# Altium PCB isa_fdc.PcbDoc (part 2 of 2)
Units mm, origin at the board's own origin, x right, y up, seen from the top; angles counter-clockwise.
Board outline 104.14 x 83.82 mm, 2 copper layers (F.Cu, B.Cu); 36 components, 102 nets, 408 pads, 101 vias.
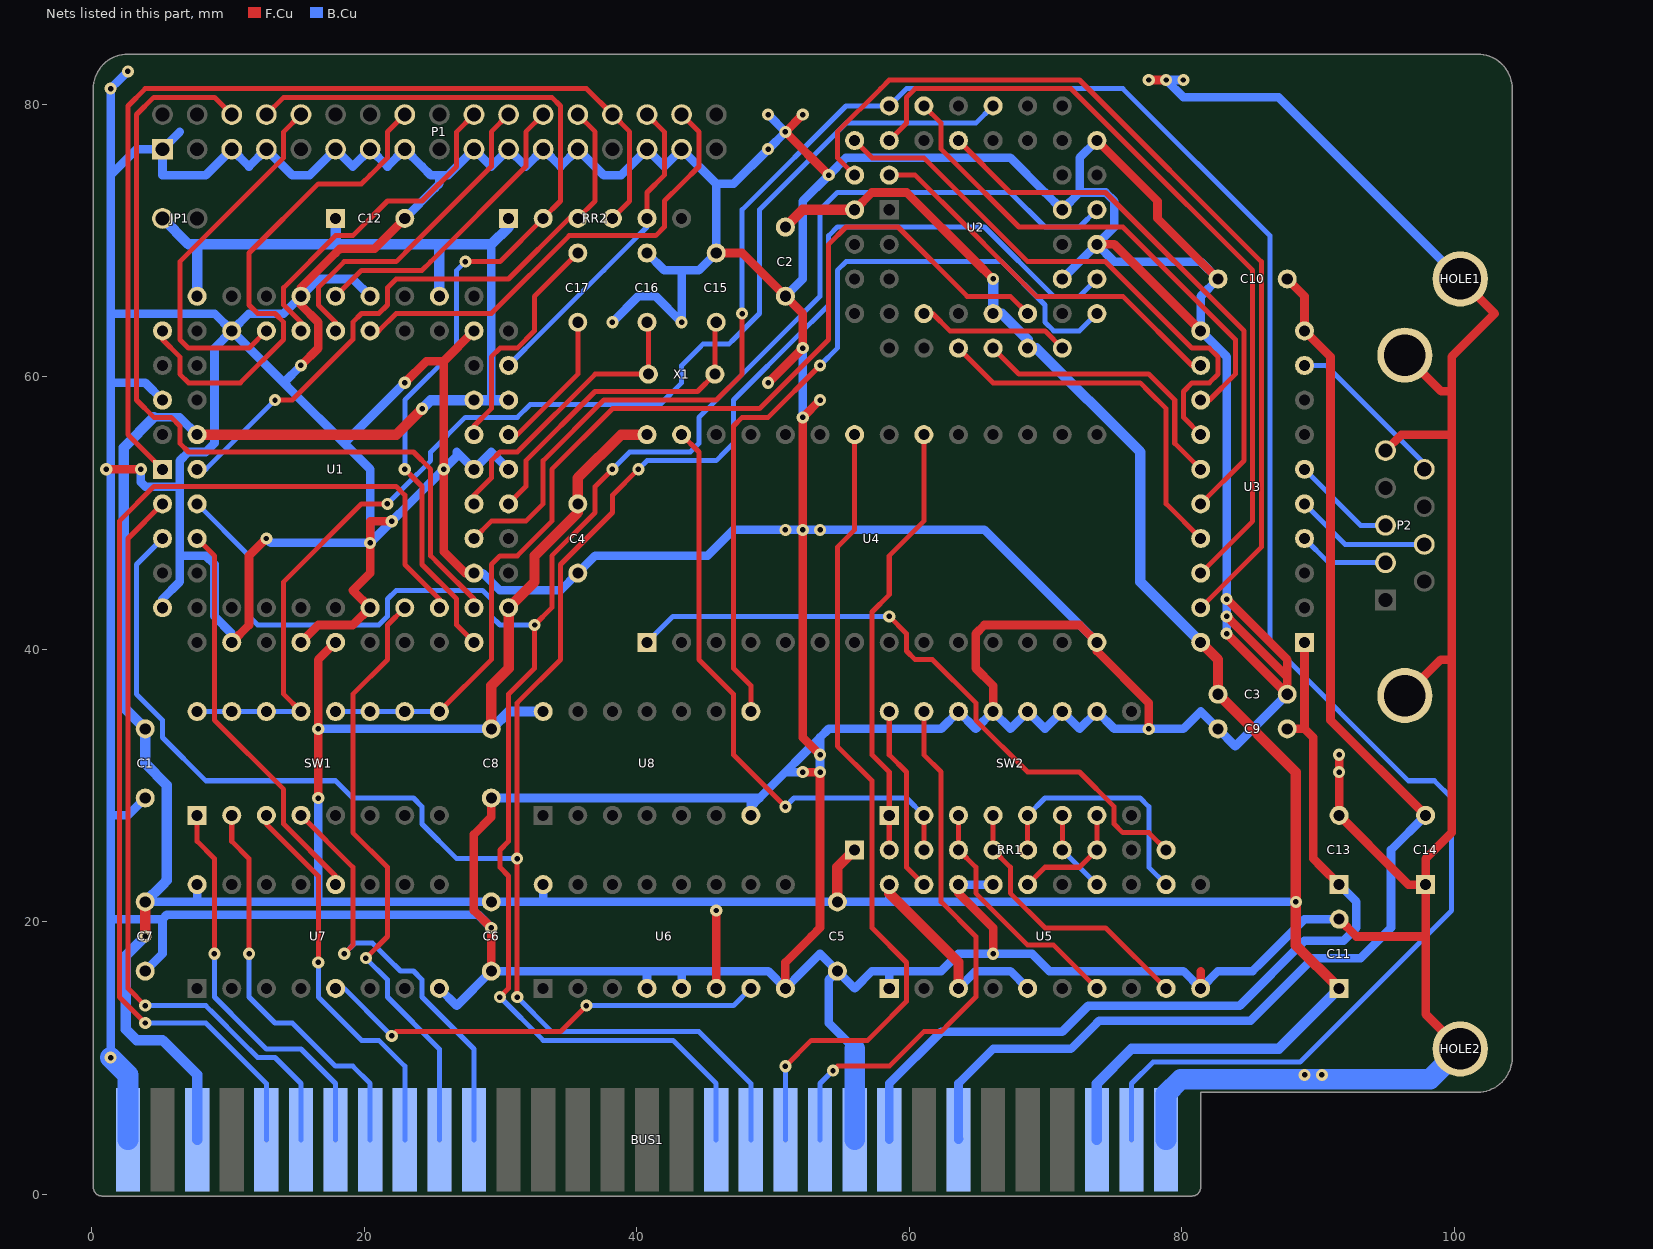
[diagram p2: the nets of this part, all layers, seen from the top]

## Via types
v1: diameter 0.889, hole 0.4, F.Cu to B.Cu, tented both sides, 101 vias

## Nets (pads, with @x,y where several pads share a name; then routed paths per layer and width w, separated by ;. In a path a pad name is that pad's centre, name@x,y a point inside that pad or via, vN(x,y) a via of type N, cw(c..) or ccw(c..) an arc to the next point about the centre after c; other vN are vias at no path point) (continued)
GND: BUS1.1 BUS1.10 BUS1.31 C1.2 C2.2 C3.2 C4.2 C5.2 C6.2 C7.2 C8.2 C9.2 C10.1 C11.2 C12.2 C13.2 C14.1 C15.2 C16.2 HOLE1.1 HOLE2.1 P1.1 P1.5 P1.7 P1.11 P1.13 P1.15 P1.19 P1.21 P1.23 P1.25 P1.29 P1.31 P2.5 P2.Un1 P2.Un2 SW2.10 SW2.11 SW2.12 SW2.13 SW2.14 U1.9 U1.12 U1.16 U1.21 U1.30 U1.35 U1.36 U1.45 U1.50 U1.54 U1.59 U1.65 U2.21 U2.22 U2.25 U2.28 U3.11 U4.14 U5.1 U5.10 U5.17 U5.18 U6.4 U6.5 U6.8 U7.8 U8.7 | length 1023.5
  F.Cu w0.632: v1(1.079,53.213) v1(3.619,53.213) ; U1.12@10.287,40.513 11.557,41.783 11.557,46.863 v1(12.827,48.133) ; U1.16@15.367,40.513 16.637,41.783 19.177,41.783 U1.21@20.447,43.053 19.177,44.323 20.447,45.593 20.447,46.228 20.447,47.498 v1(20.447,47.816) 20.447,49.403 v1(22.034,49.403) ; v1(15.367,60.833) 16.637,62.103 16.637,64.008 15.367,65.278 U1.54@15.367,65.913 15.367,66.548 17.907,69.088 18.224,69.406 20.764,69.406 C12.2@22.987,71.628 ; v1(22.987,59.563) 24.575,61.151 25.845,61.151 ; U1.30@28.067,45.593 27.432,45.593 26.797,46.228 25.845,47.18 25.845,49.403 v1(25.845,53.213) 25.845,61.151 ; U1.45@28.067,63.373 25.845,61.151 ; C6.2@29.337,16.383 v1(29.337,19.558) 29.332,19.558 28.062,20.828 28.062,26.411 29.337,27.686 C8.2@29.337,29.083 ; C15.2@45.847,69.088 47.752,69.088 C2.2@50.927,65.913 52.197,64.643 v1(52.197,62.103) v1(49.657,59.563) ; U6.8@50.927,15.113 50.927,17.018 52.832,18.923 53.467,19.558 v1(53.467,30.988) v1(52.197,30.988) ; v1(52.197,79.248) v1(50.927,77.978) v1(54.102,74.803) ; v1(53.467,32.258) 52.197,33.528 v1(52.197,48.768) 52.197,53.848 v1(52.197,57.023) v1(53.467,58.293) ; U5.18@63.627,22.733 63.627,22.098 66.167,19.558 66.167,18.923 v1(66.167,17.653) ; SW2.13@66.167,35.433 66.167,37.338 64.897,38.608 64.897,41.148 65.532,41.783 72.517,41.783 U4.14@73.787,40.513 73.787,39.878 77.597,36.068 v1(77.597,34.163) ; U2.22@73.787,69.723 75.057,69.723 U3.11@81.407,63.373 ; U2.28@73.787,77.343 78.232,72.898 78.232,71.628 C10.1@82.677,67.183 ; v1(77.597,81.788) v1(78.867,81.788) ; U5.10@81.407,15.113 81.407,16.383 ; v1(83.312,41.148) C3.2@87.757,36.703 87.757,37.973 ; v1(83.312,42.418) 83.947,41.783 87.757,37.973 ; v1(83.312,43.688) 87.757,39.243 87.757,37.973 ; C11.2@91.567,20.193 92.837,18.923 97.917,18.923 ; v1(91.567,32.258) v1(91.567,30.988) C13.2@91.567,27.813 96.012,23.368 96.647,22.733 C14.1@97.917,22.733 ; P2.5@94.971,54.585 96.139,55.753 99.822,55.753 ; P2.Un1@96.393,36.604 99.032,39.243 99.822,39.243 ; P2.Un2@96.393,61.592 99.057,58.928 99.822,58.928 ; HOLE2.1@100.457,10.668 97.917,13.208 97.917,14.478 97.917,18.923 ; HOLE1.1@100.457,67.183 102.997,64.643 99.822,61.468 99.822,58.928 ; 97.917,18.923 97.917,20.828 C14.1@97.917,22.733 ; C14.1@97.917,22.733 97.917,24.003 97.917,24.638 99.822,26.543 99.822,39.243 ; 99.822,39.243 99.822,39.878 99.822,54.483 99.822,55.753 ; 99.822,55.753 99.822,58.928
  B.Cu w0.632: v1(1.079,53.213) v1@1.397,53.213 ; 2.667,8.763 v1(1.397,10.033) 1.397,17.653 1.397,19.558 1.397,20.193 ; v1(2.667,82.423) 2.032,81.788 v1(1.397,81.153) 1.397,74.803 ; v1(3.619,53.213) 3.619,52.261 3.937,51.943 6.477,51.943 ; C7.2@3.937,16.383 5.207,17.653 5.207,19.558 5.207,20.193 ; C1.2@3.937,29.083 2.667,27.813 1.397,27.813 ; U1.9@5.207,43.053 5.207,43.688 6.477,44.958 6.477,46.863 ; U1.65@5.207,58.293 3.937,59.563 1.397,59.563 ; 6.477,77.978 P1.1@5.207,76.708 ; U1.12@10.287,40.513 10.287,41.148 9.017,42.418 9.017,45.593 9.017,46.228 8.382,46.863 6.477,46.863 ; v1(12.827,48.133) 13.144,47.816 v1(20.447,47.816) ; v1(15.367,60.833) 14.097,59.563 ; U1.50@20.447,65.913 19.177,67.183 16.637,67.183 U1.54@15.367,65.913 14.097,64.643 11.557,64.643 U1.59@10.287,63.373 ; v1(22.987,59.563) 18.542,55.118 ; C12.2@22.987,71.628 25.209,73.85 25.527,74.168 25.527,74.803 ; U7.8@25.527,15.113 26.797,13.843 C6.2@29.337,16.383 31.877,16.383 40.767,16.383 ; U1.30@28.067,45.593 28.702,45.593 29.972,44.323 33.147,44.323 34.417,44.323 C4.2@35.687,45.593 36.957,46.863 43.942,46.863 45.212,46.863 47.117,48.768 v1(50.927,48.768) v1(52.197,48.768) v1(53.467,48.768) 65.532,48.768 U4.14@73.787,40.513 ; v1(29.337,19.558) 28.384,20.511 20.447,20.511 7.112,20.511 5.524,20.511 5.207,20.193 ; C8.2@29.337,29.083 31.877,29.083 47.117,29.083 48.387,29.083 ; U1.35@30.607,53.213 29.337,54.483 U1.36@28.067,53.213 26.797,54.483 26.797,54.165 v1(25.845,53.213) 23.304,50.673 v1(22.034,49.403) v1(20.447,47.816) ; v1(38.227,64.008) 40.132,65.913 41.402,65.913 v1(43.307,64.008) 43.307,67.818 ; U6.4@40.767,15.113 40.767,16.383 ; C16.2@40.767,69.088 42.037,67.818 43.307,67.818 ; U6.5@43.307,15.113 43.307,16.383 42.672,16.383 ; v1(49.657,79.248) v1(50.927,77.978) v1(49.657,76.708) 47.117,74.168 45.847,74.168 ; C2.2@50.927,65.913 52.197,67.183 52.197,72.898 v1(54.102,74.803) 55.372,76.073 67.437,76.073 69.977,73.533 U2.25@71.247,72.263 72.517,73.533 ; v1(52.197,30.988) 50.927,30.988 ; v1(52.197,57.023) v1(52.197,62.103) ; v1(53.467,30.988) v1(53.467,32.258) 53.467,33.528 ; 56.007,10.668 54.102,12.573 54.102,15.748 C5.2@54.737,16.383 ; U5.1@58.547,15.113 58.547,16.383 ; U5.18@63.627,22.733 U5.17@66.167,22.733 ; U2.21@71.247,67.183 U2.22@73.787,69.723 ; U2.28@73.787,77.343 72.517,76.073 72.517,73.533 ; v1(80.137,81.788) v1(78.867,81.788) 80.137,80.518 87.122,80.518 90.297,77.343 HOLE1.1@100.457,67.183 ; v1(83.312,41.148) v1(83.312,42.418) v1(83.312,43.688) 83.312,61.468 U3.11@81.407,63.373 81.407,65.913 C10.1@82.677,67.183 81.407,68.453 75.057,68.453 U2.22@73.787,69.723 ; C3.2@87.757,36.703 83.947,32.893 C9.2@82.677,34.163 81.407,35.433 80.137,34.163 79.502,34.163 v1(77.597,34.163) 75.057,34.163 SW2.10@73.787,35.433 72.517,34.163 SW2.11@71.247,35.433 69.977,34.163 SW2.12@68.707,35.433 67.437,34.163 SW2.13@66.167,35.433 64.897,34.163 SW2.14@63.627,35.433 62.357,34.163 54.102,34.163 53.467,33.528 ; v1(89.027,8.763) v1(90.297,8.763) 98.552,8.763 HOLE2.1@100.457,10.668 ; C11.2@91.567,20.193 89.027,20.193 85.852,17.018 85.217,16.383 82.677,16.383 U5.10@81.407,15.113 80.137,16.383 70.294,16.383 69.025,17.653 v1(66.167,17.653) 63.627,17.653 62.357,16.383 58.547,16.383 ; 1.397,20.193 5.207,20.193 ; 1.397,20.193 1.397,27.813 ; 1.397,27.813 1.397,29.083 v1@1.397,53.213 ; v1@1.397,53.213 1.397,58.293 1.397,59.563 ; 1.397,59.563 1.397,64.643 ; 1.397,64.643 1.397,72.898 1.397,74.803 ; 1.397,64.643 9.017,64.643 U1.59@10.287,63.373 ; 1.397,74.803 3.302,76.708 P1.1@5.207,76.708 ; P1.1@5.207,76.708 5.207,74.803 8.382,74.803 P1.5@10.287,76.708 11.557,75.438 P1.7@12.827,76.708 14.732,74.803 16.002,74.803 P1.11@17.907,76.708 19.177,75.438 P1.13@20.447,76.708 21.717,75.438 P1.15@22.987,76.708 24.257,75.438 24.892,74.803 25.527,74.803 ; 6.477,46.863 6.477,51.308 6.477,51.943 ; 6.477,51.943 6.477,53.848 7.112,54.483 8.382,54.483 9.017,55.118 9.017,62.103 U1.59@10.287,63.373 ; U1.59@10.287,63.373 14.097,59.563 ; 14.097,59.563 14.732,58.928 18.542,55.118 ; 18.542,55.118 20.447,53.213 20.447,50.673 v1(20.447,47.816) ; 25.527,74.803 26.162,74.803 P1.19@28.067,76.708 29.337,75.438 P1.21@30.607,76.708 31.877,75.438 P1.23@33.147,76.708 34.417,75.438 P1.25@35.687,76.708 37.592,74.803 38.862,74.803 P1.29@40.767,76.708 42.037,75.438 P1.31@43.307,76.708 45.847,74.168 ; 40.767,16.383 42.672,16.383 ; 42.672,16.383 49.657,16.383 U6.8@50.927,15.113 52.197,16.383 53.467,17.653 C5.2@54.737,16.383 ; 43.307,67.818 44.577,67.818 C15.2@45.847,69.088 45.847,73.533 45.847,74.168 ; 48.387,29.083 U8.7@48.387,27.813 48.387,28.448 49.022,29.083 ; 48.387,29.083 49.022,29.083 ; 49.022,29.083 50.927,30.988 ; 50.927,30.988 52.197,32.258 53.467,33.528 ; C5.2@54.737,16.383 56.007,15.113 57.277,16.383 58.547,16.383 ; 72.517,73.533 74.422,73.533 75.057,72.898 75.057,70.993 U2.22@73.787,69.723
  B.Cu w1.524: v1(1.397,10.033) 2.667,8.763 BUS1.31@2.667,4 ; BUS1.10@56.007,4 56.007,10.668 ; BUS1.1@78.867,4 78.867,7.366 79.947,8.445 98.234,8.445 HOLE2.1@100.457,10.668
HDSEL: P1.32 U1.51 | length 34.6
  F.Cu w0.368: U1.51@20.447,63.373 21.082,63.373 22.352,64.643 28.702,64.643 29.337,64.643 35.052,70.358 39.497,70.358 41.402,70.358 42.037,70.993 42.037,72.898 43.307,74.168 44.577,75.438 44.577,77.978 P1.32@43.307,79.248
INDEX: P1.8 RR2.2 U1.26 | length 70.1
  F.Cu w0.368: P1.8@12.827,79.248 14.097,80.518 33.782,80.518 34.417,79.883 34.417,72.898 RR2.2@33.147,71.628 29.972,68.453 29.337,68.453 v1(27.432,68.453) ; v1(22.987,53.213) 23.622,52.578 24.257,51.943 24.257,50.673 24.257,46.228 26.797,43.688 26.797,41.783 U1.26@28.067,40.513
  B.Cu w0.368: v1(22.987,53.213) 22.987,56.388 22.987,58.293 26.797,62.103 26.797,67.818 v1(27.432,68.453)
IRQ3: BUS1.25 SW1.1 | length 29.5
  F.Cu w0.368: SW1.1@7.747,27.813 7.747,25.908 9.017,24.638 v1(9.017,17.653)
  B.Cu w0.368: v1(9.017,17.653) 9.017,14.478 11.557,11.938 12.827,10.668 15.367,10.668 17.907,8.128 BUS1.25@17.907,4
IRQ4: BUS1.24 SW1.2 | length 29.5
  F.Cu w0.368: SW1.2@10.287,27.813 10.287,25.908 11.557,24.638 v1(11.557,17.653)
  B.Cu w0.368: v1(11.557,17.653) 11.557,14.478 13.462,12.573 14.732,12.573 15.367,11.938 17.907,9.398 19.177,9.398 20.447,8.128 BUS1.24@20.447,4
IRQ5: BUS1.23 SW1.3 | length 28.8
  F.Cu w0.368: SW1.3@12.827,27.813 12.827,27.178 16.637,23.368 16.637,17.653 v1(16.637,17.018)
  B.Cu w0.368: v1(16.637,17.018) 16.637,14.478 17.272,13.843 18.542,12.573 19.812,11.303 21.082,11.303 22.987,9.398 BUS1.23@22.987,4
IRQ6: BUS1.22 U1.23 | length 44.6
  F.Cu w0.368: v1(20.13,17.335) 21.717,18.923 21.717,24.003 19.177,26.543 19.177,30.353 19.177,36.703 21.717,39.243 21.717,41.783 U1.23@22.987,43.053
  B.Cu w0.368: v1(20.13,17.335) 21.717,15.748 21.717,14.478 25.527,10.668 25.527,9.398 25.527,8.128 BUS1.22@25.527,4
IRQ7: BUS1.21 SW1.4 | length 32.5
  F.Cu w0.368: SW1.4@15.367,27.813 19.177,24.003 19.177,18.288 v1(18.542,17.653)
  B.Cu w0.368: v1(18.542,17.653) 19.334,18.445 20.607,18.445 21.717,17.335 22.669,16.383 23.622,16.383 24.257,15.748 24.257,14.478 28.067,10.668 28.067,8.128 BUS1.21@28.067,4
MEA: P1.10 U1.57 | length 27.3
  F.Cu w0.368: U1.57@12.827,63.373 11.557,62.103 7.112,62.103 6.477,62.738 6.477,67.818 6.477,68.453 14.097,76.073 14.097,77.978 P1.10@15.367,79.248
MEB: P1.16 U1.61 | length 37.8
  F.Cu w0.368: U1.61@5.207,63.373 5.207,62.738 6.477,61.468 6.477,60.198 7.112,59.563 10.922,59.563 14.097,62.738 14.097,64.008 13.462,64.643 12.192,64.643 11.557,65.278 11.557,66.548 11.557,68.453 11.557,69.088 16.637,74.168 17.272,74.168 19.812,74.168 20.447,74.803 21.717,76.073 21.717,77.978 P1.16@22.987,79.248
N-000011: U2.10 U2.17 | length 11.2
  F.Cu w0.368: U2.10@61.087,64.643 61.722,64.643 62.992,63.373 69.977,63.373 U2.17@71.247,62.103
N-000041: RR1.7 SW2.6 U5.14 | length 6.1
  F.Cu w0.368: RR1.7@71.247,25.273 SW2.6@71.247,27.813
  B.Cu w0.368: RR1.7@71.247,25.273 U5.14@73.787,22.733
N-000042: RR1.5 SW2.4 U5.9 | length 20.6
  F.Cu w0.368: SW2.4@66.167,27.813 RR1.5@66.167,25.273 67.437,24.003 67.437,22.098 69.977,19.558 74.422,19.558 U5.9@78.867,15.113
N-000044: RR1.8 SW2.7 U5.16 | length 8.7
  F.Cu w0.368: U5.16@68.707,22.733 69.977,24.003 72.517,24.003 RR1.8@73.787,25.273 SW2.7@73.787,27.813
N-000067: U6.7 U7.5 | length 33.4
  F.Cu w0.368: v1(22.034,11.62) 22.352,11.938 22.987,11.938 34.417,11.938 35.052,12.573 v1(36.322,13.843)
  B.Cu w0.368: U7.5@17.907,15.113 18.542,15.113 21.717,11.938 v1(22.034,11.62) ; v1(36.322,13.843) 42.672,13.843 47.117,13.843 U6.7@48.387,15.113
N-000074: C17.2 U1.37 | length 10.7
  F.Cu w0.368: U1.37@30.607,55.753 31.242,55.753 35.687,60.198 C17.2@35.687,64.008
N-000080: C17.1 U1.38 | length 17.2
  F.Cu w0.368: U1.38@28.067,55.753 28.067,56.388 29.337,57.658 29.337,61.468 29.972,62.103 31.242,62.103 32.512,63.373 32.512,65.913 C17.1@35.687,69.088
N-000088: C16.1 U1.34 X1.2 | length 21.7
  F.Cu w0.368: U1.34@28.067,50.673 28.067,51.308 29.337,52.578 29.337,53.848 29.972,54.483 31.242,54.483 36.957,60.198 X1.2@40.866,60.198 40.866,63.909 C16.1@40.767,64.008
N-000120: P1.6 U1.28 | length 64.9
  F.Cu w0.368: P1.6@10.287,79.248 9.017,80.518 4.572,80.518 3.302,79.248 3.302,58.293 4.572,57.023 5.842,57.023 6.477,56.388 6.477,55.118 7.112,54.483 16.637,54.483 17.272,54.483 23.622,54.483 24.892,53.213 24.892,50.043 24.887,50.038 24.892,50.038 24.892,46.863 25.527,46.228 28.067,43.688 U1.28@28.067,43.053
N-000134: U2.18 U8.8 | length 59.9
  F.Cu w0.368: U8.8@48.387,35.433 48.387,37.338 47.117,38.608 47.117,53.848 47.117,55.753 47.117,56.388 47.752,57.023 49.022,57.023 49.657,57.023 v1(53.467,60.833)
  B.Cu w0.368: v1(53.467,60.833) 54.737,62.103 54.737,62.738 54.737,64.008 54.737,67.818 55.372,68.453 66.802,68.453 69.977,65.278 69.977,64.008 70.612,63.373 72.517,63.373 U2.18@73.787,64.643
N-000136: C15.1 U1.33 X1.1 | length 24.1
  F.Cu w0.368: U1.33@30.607,50.673 31.877,51.943 31.877,53.213 31.877,53.848 36.952,58.923 44.473,58.923 X1.1@45.748,60.198 45.748,63.909 C15.1@45.847,64.008
N-000151: RR1.6 SW2.5 U5.12 | length 18.5
  F.Cu w0.368: RR1.6@68.707,25.273 SW2.5@68.707,27.813
  B.Cu w0.368: SW2.5@68.707,27.813 69.977,29.083 74.422,29.083 76.962,29.083 77.597,28.448 77.597,25.908 77.597,24.003 U5.12@78.867,22.733
N-000152: RR1.4 SW2.3 U5.7 | length 18
  F.Cu w0.368: SW2.3@63.627,27.813 RR1.4@63.627,25.273 64.897,24.003 64.897,22.098 68.707,18.288 70.612,18.288 71.247,17.653 U5.7@73.787,15.113
RDATA: P1.30 RR2.5 U1.41 | length 23.7
  F.Cu w0.368: RR2.5@40.767,71.628 40.767,73.533 42.037,74.803 42.037,77.978 P1.30@40.767,79.248
  B.Cu w0.368: U1.41@30.607,60.833 33.147,63.373 37.592,67.818 39.497,69.723 40.767,70.993 RR2.5@40.767,71.628
RESETDRV: BUS1.2 U1.32 U2.39 | length 174.5
  F.Cu w0.368: U1.32@28.067,48.133 29.337,49.403 31.877,49.403 33.147,50.673 33.147,53.213 33.147,53.848 37.592,58.293 38.227,58.293 45.847,58.293 47.752,60.198 v1(47.752,64.643)
  B.Cu w0.368: v1(47.752,64.643) 47.752,72.263 55.372,79.883 56.642,79.883 U2.39@58.547,79.883 59.817,81.153 75.057,81.153 75.692,81.153 86.487,70.358 86.487,40.513 96.647,30.353 98.552,30.353 99.822,29.083 99.822,20.828 88.709,9.716 88.392,9.716 78.232,9.716 77.915,9.716 76.327,8.128 BUS1.2@76.327,4
RI: P2.9 U3.9 | length 12.2
  B.Cu w0.368: U3.9@89.027,60.833 90.614,60.833 97.815,53.632 P2.9@97.815,53.213
RTS: P2.7 U3.5 | length 14.2
  B.Cu w0.368: P2.7@97.815,47.701 91.999,47.701 ; 91.999,47.701 U3.5@89.027,50.673 91.999,47.701
RX: P2.2 U3.4 | length 9.2
  B.Cu w0.368: P2.2@94.971,46.355 90.805,46.355 ; 90.805,46.355 U3.4@89.027,48.133 90.805,46.355
SIN: U2.11 U3.17 | length 27.7
  F.Cu w0.368: U2.11@63.627,62.103 66.167,59.563 69.972,59.563 76.962,59.563 77.597,58.928 78.867,57.658 78.867,50.673 U3.17@81.407,48.133
SOUT: U2.13 U3.15 | length 20.8
  F.Cu w0.368: U2.13@66.167,62.103 66.167,62.093 68.057,60.203 ; U3.15@81.407,53.213 79.502,55.118 79.502,58.293 78.232,59.563 77.592,60.203 68.057,60.203 ; 68.057,60.203 68.057,60.193 68.057,60.203
STEP: P1.20 U1.55 | length 24.4
  F.Cu w0.368: U1.55@15.367,63.373 15.367,63.642 15.367,64.008 14.097,65.278 14.097,66.548 17.907,70.358 19.177,70.358 21.717,72.898 24.257,72.898 26.797,75.438 26.797,77.978 P1.20@28.067,79.248
TC: BUS1.27 U1.25 | length 84.1
  F.Cu w0.368: v1(3.937,12.573) 2.032,14.478 2.032,49.403 4.572,51.943 17.272,51.943 21.082,51.943 22.352,51.943 22.987,51.308 22.987,50.038 22.987,46.228 24.892,44.323 25.527,43.688 U1.25@25.527,43.053
  B.Cu w0.368: v1(3.937,12.573) 7.747,12.573 8.382,12.573 10.287,10.668 12.827,8.128 BUS1.27@12.827,4
TRK00: P1.26 RR2.3 U1.2 | length 45.7
  F.Cu w0.368: v1(13.462,58.293) 14.732,58.293 19.177,62.738 19.177,64.008 19.812,64.643 21.082,64.643 21.717,65.278 21.717,65.913 21.717,66.548 22.352,67.183 30.607,67.183 35.052,71.628 RR2.3@35.687,71.628 36.957,72.898 36.957,74.803 36.957,77.978 P1.26@35.687,79.248
  B.Cu w0.368: U1.2@7.747,53.213 8.382,53.213 12.827,57.658 v1(13.462,58.293)
TX: P2.3 U3.6 | length 13.5
  B.Cu w0.368: P2.3@94.971,49.098 93.142,49.098 ; 93.142,49.098 U3.6@89.027,53.213 93.142,49.098
UART_IRQ: SW1.13 SW1.14 SW1.15 SW1.16 U2.33 | length 91.6
  F.Cu w0.368: SW1.13@15.367,35.433 14.097,36.703 14.097,43.688 14.097,44.958 19.812,50.673 v1(21.717,50.673)
  B.Cu w0.368: SW1.16@7.747,35.433 SW1.15@10.287,35.433 SW1.14@12.827,35.433 SW1.13@15.367,35.433 ; v1(21.717,50.673) 22.987,51.943 24.892,53.848 24.892,54.483 27.432,57.023 31.242,57.023 32.194,57.975 40.45,57.975 41.719,57.975 43.307,59.563 43.307,60.833 ; U2.33@66.167,79.883 64.897,78.613 55.372,78.613 49.022,72.263 49.022,64.643 47.117,62.738 46.799,62.42 44.895,62.42 44.577,62.103 ; 43.307,60.833 44.577,62.103 ; 43.307,60.833 44.577,62.103
VCC: BUS1.3 BUS1.29 C1.1 C2.1 C3.1 C4.1 C5.1 C6.1 C7.1 C8.1 C11.1 C12.1 JP1.1 RR1.1 RR2.1 U1.18 U1.27 U1.39 U1.40 U1.46 U1.60 U1.68 U2.14 U2.15 U2.44 U3.20 U4.28 U5.3 U5.5 U5.20 U6.6 U6.16 U7.16 U8.14 | length 560
  F.Cu w0.632: v1(16.637,29.083) 16.637,29.718 16.637,30.353 16.637,30.988 16.637,31.623 v1(16.637,34.163) 16.637,39.243 U1.18@17.907,40.513 ; 22.352,55.753 v1(24.257,57.658) ; 29.337,37.338 30.607,38.608 U1.27@30.607,43.053 ; 32.512,44.958 32.512,46.863 35.687,50.038 C4.1@35.687,50.673 ; U6.6@45.847,15.113 45.847,18.923 v1(45.847,20.828) ; 52.197,72.263 U2.44@56.007,72.263 57.277,73.533 59.817,73.533 64.897,68.453 v1(66.167,67.183) ; 54.737,24.003 RR1.1@56.007,25.273 ; U5.20@58.547,22.733 58.547,22.098 63.627,17.018 ; U3.20@81.407,40.513 82.677,39.243 ; 88.392,18.288 C11.1@91.567,15.113 89.822,16.858 89.662,17.018 ; v1(88.392,21.463) 88.392,30.988
  F.Cu w0.762: v1(3.937,18.923) C7.1@3.937,21.463 ; U1.68@7.747,55.753 22.352,55.753 v1(24.257,57.658) ; C8.1@29.337,34.163 29.337,37.338 30.607,38.608 U1.27@30.607,43.053 32.512,44.958 32.512,46.863 35.687,50.038 C4.1@35.687,50.673 35.687,52.578 38.862,55.753 U4.28@40.767,55.753 ; C2.1@50.927,70.993 52.197,72.263 U2.44@56.007,72.263 ; C5.1@54.737,21.463 54.737,24.003 RR1.1@56.007,25.273 ; U5.20@58.547,22.733 58.547,22.098 63.627,17.018 U5.3@63.627,15.113 ; U3.20@81.407,40.513 82.677,39.243 C3.1@82.677,36.703 88.392,30.988 v1(88.392,21.463) 88.392,18.288 C11.1@91.567,15.113
  B.Cu w0.632: 2.349,54.8 2.349,52.578 2.349,35.75 2.667,35.433 3.302,34.798 C1.1@3.937,34.163 3.937,31.623 ; 2.667,11.938 3.302,11.303 5.207,11.303 7.747,8.763 ; 2.667,17.653 v1(3.937,18.923) ; 4.572,57.023 6.477,57.023 U1.68@7.747,55.753 ; 5.207,22.733 4.572,22.098 C7.1@3.937,21.463 7.747,21.463 ; 7.112,69.723 7.747,69.723 11.557,69.723 17.907,69.723 25.527,69.723 28.702,69.723 29.337,69.723 ; U7.16@7.747,22.733 7.747,21.463 ; v1(16.637,29.083) 16.637,21.463 ; v1(16.637,34.163) C8.1@29.337,34.163 30.607,35.433 ; v1(24.257,57.658) 24.892,58.293 ; 25.527,58.293 26.162,58.293 U1.40@28.067,58.293 29.337,58.293 ; U1.39@30.607,58.293 29.337,58.293 ; RR2.1@30.607,71.628 30.607,70.993 29.337,69.723 ; U6.16@33.147,22.733 33.147,21.463 ; v1(45.847,20.828) 45.847,21.463 ; U5.20@58.547,22.733 58.547,21.463 ; U5.3@63.627,15.113 64.897,16.383 67.437,16.383 U5.5@68.707,15.113 ; U2.14@66.167,64.643 66.802,64.643 67.437,64.008 U2.15@68.707,62.738 ; U2.15@68.707,62.103 69.342,62.103 73.152,58.293 76.962,54.483 76.962,44.958 ; v1(88.392,21.463) 82.042,21.463 63.627,21.463 58.547,21.463 ; 7.747,21.463 16.637,21.463 ; 16.637,21.463 C6.1@29.337,21.463 33.147,21.463 ; 29.337,58.293 29.337,69.723 ; 33.147,21.463 45.847,21.463 ; 45.847,21.463 C5.1@54.737,21.463 58.547,21.463
  B.Cu w0.762: v1(3.937,18.923) 2.51,17.496 2.51,12.095 3.302,11.303 5.207,11.303 7.747,8.763 BUS1.29@7.747,4 ; C7.1@3.937,21.463 5.207,22.733 5.524,23.05 5.524,30.035 3.937,31.623 C1.1@3.937,34.163 3.937,34.168 2.349,35.756 2.349,54.8 4.572,57.023 ; JP1.1@5.207,71.628 7.112,69.723 29.337,69.723 30.607,70.993 RR2.1@30.607,71.628 ; U1.60@7.747,65.913 7.747,69.723 ; 17.907,69.723 C12.1@17.907,71.628 ; v1(24.257,57.658) 24.892,58.293 U1.40@28.067,58.293 U1.39@30.607,58.293 ; U1.46@25.527,65.913 25.527,69.723 ; C8.1@29.337,34.163 30.607,35.433 U8.14@33.147,35.433 ; v1(66.167,67.183) U2.14@66.167,64.643 66.802,64.643 68.707,62.738 U2.15@68.707,62.103 69.342,62.103 76.962,54.483 76.962,44.958 U3.20@81.407,40.513 ; BUS1.3@73.787,4 73.787,8.128 76.327,10.668 87.122,10.668 C11.1@91.567,15.113
VDD: BUS1.9 C9.1 C13.1 U3.1 | length 67
  F.Cu w0.632: C9.1@87.757,34.163 89.027,34.163 ; U3.1@89.027,40.513 89.027,34.163 ; C13.1@91.567,22.733 90.297,24.003 89.662,24.638 89.662,33.528 89.027,34.163
  B.Cu w0.632: BUS1.9@58.547,4 58.547,8.128 62.357,11.938 71.247,11.938 73.152,13.843 84.264,13.843 89.027,18.605 91.885,18.605 92.837,19.558 92.837,21.463 C13.1@91.567,22.733
VSS: BUS1.7 C10.2 C14.2 U3.10 | length 93.6
  F.Cu w0.632: C10.2@87.757,67.183 89.027,65.913 U3.10@89.027,63.373 90.932,61.468 90.932,34.798 C14.2@97.917,27.813
  B.Cu w0.632: BUS1.7@63.691,4.064 BUS1.7@63.627,4 63.627,8.128 66.167,10.668 71.882,10.668 73.787,12.573 73.947,12.733 85.06,12.733 89.662,17.335 90.932,17.335 93.154,17.335 95.377,19.558 95.377,20.828 95.377,22.098 95.377,25.273 C14.2@97.917,27.813
WDATA: P1.22 U1.53 | length 24.4
  F.Cu w0.368: U1.53@17.907,63.373 17.907,64.008 16.637,65.278 16.637,66.548 18.542,68.453 22.352,68.453 23.622,69.723 29.337,75.438 29.337,77.978 P1.22@30.607,79.248
WE: P1.24 U1.52 | length 22.3
  F.Cu w0.368: U1.52@17.907,65.913 19.812,67.818 24.257,67.818 24.892,68.453 31.877,75.438 31.877,77.978 P1.24@33.147,79.248
WP: P1.28 RR2.4 U1.1 | length 73.3
  F.Cu w0.368: U1.1@5.207,53.213 2.667,55.753 2.667,79.883 3.937,81.153 36.322,81.153 P1.28@38.227,79.248 39.497,77.978 39.497,72.898 RR2.4@38.227,71.628
{\B\U\S\Y\}\: RR1.10 U4.1 | length 48.2
  F.Cu w0.368: v1(58.547,42.418) 59.817,41.148 59.817,39.878 60.452,39.243 61.722,39.243 64.897,36.068 64.897,34.798 68.707,30.988 69.977,30.988 72.517,30.988 75.057,28.448 75.057,27.178 75.692,26.543 76.327,26.543 77.597,26.543 RR1.10@78.867,25.273
  B.Cu w0.368: U4.1@40.767,40.513 42.037,41.783 42.672,42.418 v1(58.547,42.418)
{\C\T\S\}\: U2.40 U3.14 | length 41.3
  F.Cu w0.368: U2.40@56.007,77.343 57.277,76.073 59.182,76.073 60.452,76.073 61.087,76.073 68.707,68.453 74.422,68.453 80.772,62.103 82.042,62.103 82.677,61.468 82.677,60.198 82.042,59.563 80.772,59.563 80.137,58.928 80.137,57.023 U3.14@81.407,55.753
{\D\A\C\K\2\}\: BUS1.26 U1.3 | length 56.3
  F.Cu w0.368: v1(3.937,13.843) 2.667,15.113 2.667,48.133 U1.3@5.207,50.673
  B.Cu w0.368: v1(3.937,13.843) 4.572,13.843 8.382,13.843 9.017,13.208 10.922,11.303 12.192,10.033 13.462,10.033 15.367,8.128 BUS1.26@15.367,4
{\D\C\D\}\: U2.42 U3.19 | length 69.2
  F.Cu w0.368: U2.42@56.007,74.803 54.737,76.073 54.737,77.978 57.912,81.153 58.547,81.788 72.517,81.788 85.852,68.453 85.852,48.133 85.852,47.498 U3.19@81.407,43.053
{\D\S\R\}\: U2.41 U3.18 | length 58.7
  F.Cu w0.368: U2.41@58.547,77.343 59.817,78.613 59.817,80.518 60.452,81.153 71.882,81.153 75.692,77.343 85.217,67.818 85.217,49.403 U3.18@81.407,45.593
{\D\T\R\}\: U2.37 U3.13 | length 37
  F.Cu w0.368: U2.37@61.087,79.883 62.357,78.613 62.357,76.708 62.992,76.073 68.072,70.993 75.692,70.993 82.042,64.643 83.947,62.738 83.947,60.833 83.952,60.833 83.952,60.198 82.047,58.293 U3.13@81.407,58.293
{\F\D\C\_\C\S\}\: U1.6 U7.12 | length 29.6
  F.Cu w0.368: U1.6@7.747,48.133 9.017,46.863 9.017,34.798 14.097,29.718 14.097,29.083 14.097,27.178 17.907,23.368 U7.12@17.907,22.733
{\I\O\R\}\: BUS1.14 U1.4 U2.24 | length 150.4
  F.Cu w0.368: v1(29.972,14.478) 30.607,15.113 30.607,22.733 30.607,23.368 29.972,24.003 29.972,25.273 30.607,25.908 30.607,26.543 30.607,36.703 32.512,38.608 v1(32.512,41.783) 33.782,43.053 33.782,44.323 33.782,46.863 36.957,50.038 36.957,51.943 v1(38.227,53.213)
  B.Cu w0.368: U1.4@7.747,50.673 11.557,46.863 11.557,42.418 12.192,41.783 21.082,41.783 21.717,42.418 21.717,43.688 22.352,44.323 28.702,44.323 29.337,43.688 29.337,42.418 29.972,41.783 31.877,41.783 v1(32.512,41.783) ; v1(29.972,14.478) 33.147,11.303 42.672,11.303 45.847,8.128 BUS1.14@45.847,4 ; v1(38.227,53.213) 39.497,54.483 40.132,54.483 41.402,54.483 43.942,54.483 44.577,55.118 44.577,57.023 45.212,57.658 45.217,57.658 52.197,64.638 ; U2.24@73.787,72.263 72.517,70.993 69.977,70.993 67.437,73.533 54.737,73.533 53.467,72.263 53.467,65.913 52.197,64.643 52.197,64.638 ; 52.197,64.638 52.202,64.638 52.197,64.638
{\I\O\W\}\: BUS1.13 U1.5 U2.20 | length 161.5
  F.Cu w0.368: v1(31.242,14.478) 31.237,14.483 v1(31.237,24.638) 31.237,36.063 31.242,36.068 34.417,39.243 34.417,46.223 34.417,46.228 38.227,50.038 38.227,51.308 v1(40.132,53.213)
  B.Cu w0.368: 3.307,36.703 3.302,36.708 ; U1.5@5.207,48.133 3.302,46.228 3.302,36.708 ; v1(31.237,24.638) 26.797,24.638 24.257,27.178 24.257,28.448 23.622,29.083 19.177,29.083 17.907,30.353 9.017,30.353 8.382,30.353 5.207,33.528 5.207,34.798 3.302,36.703 3.302,36.708 ; v1(31.242,14.478) 33.782,11.938 44.577,11.938 48.387,8.128 BUS1.13@48.387,4 ; v1(40.132,53.213) 40.767,53.848 45.847,53.848 46.482,54.483 47.117,55.118 47.117,56.388 47.117,58.293 52.197,63.373 52.832,64.008 52.837,64.008 54.102,65.273 54.102,70.358 54.737,70.993 65.532,70.993 70.612,65.913 72.517,65.913 U2.20@73.787,67.183
{\M\E\M\R\}\: BUS1.12 U4.22 | length 60.5
  F.Cu w0.368: v1(50.927,9.398) 52.832,11.303 53.467,11.303 56.959,11.303 57.594,11.938 59.817,14.16 59.817,16.383 59.817,17.018 57.277,19.558 57.277,22.098 57.277,30.353 54.737,32.893 54.737,47.498 56.007,48.768 56.007,53.848 U4.22@56.007,55.753
  B.Cu w0.368: BUS1.12@50.927,4 50.927,8.763 v1(50.927,9.398)
{\M\E\M\W\}\: BUS1.11 SW2.15 | length 40.7
  F.Cu w0.368: v1(54.419,9.08) 54.742,9.403 55.377,9.403 55.377,9.398 57.277,9.398 58.547,9.398 60.452,11.303 61.087,11.938 62.357,11.938 62.992,12.573 64.897,14.478 64.897,18.923 62.357,21.463 62.357,22.733 62.357,30.988 61.087,32.258 SW2.15@61.087,35.433
  B.Cu w0.368: BUS1.11@53.467,4 53.467,8.128 v1(54.419,9.08)
{\R\I\}\: U2.43 U3.12 | length 28.6
  F.Cu w0.368: U2.43@58.547,74.803 60.452,74.803 64.262,70.993 66.802,68.453 69.342,65.913 75.692,65.913 80.772,60.833 U3.12@81.407,60.833
{\R\O\M\_\C\S\_\I\N\}\: SW2.16 U5.19 | length 13.8
  F.Cu w0.368: SW2.16@58.547,35.433 58.547,32.258 59.817,30.988 59.817,24.638 59.817,24.003 U5.19@61.087,22.733
{\R\O\M\_\C\S\}\: RR1.2 SW2.1 U4.20 | length 32.6
  F.Cu w0.368: RR1.2@58.547,25.273 SW2.1@58.547,27.813 58.547,30.988 57.277,32.258 57.277,42.735 58.547,44.005 58.547,46.863 61.087,49.403 U4.20@61.087,55.753
{\R\O\M\W\}\: RR1.3 SW2.2 U4.27 | length 44
  F.Cu w0.368: U4.27@43.307,55.753 44.577,54.483 44.577,39.243 47.117,36.703 47.117,34.798 47.117,32.258 v1(50.927,28.448) ; RR1.3@61.087,25.273 SW2.2@61.087,27.813
  B.Cu w0.368: v1(50.927,28.448) 51.562,29.083 59.817,29.083 SW2.2@61.087,27.813
{\R\T\S\}\: U2.36 U3.16 | length 40.8
  F.Cu w0.368: U2.36@63.627,77.343 67.437,73.533 74.422,73.533 84.582,63.373 84.582,53.848 U3.16@81.407,50.673
{\U\A\R\T\_\C\S\}\: SW1.9 SW1.10 SW1.11 SW1.12 U2.16 | length 78.6
  F.Cu w0.368: SW1.9@25.527,35.433 29.337,39.243 29.337,39.878 29.337,46.228 29.972,46.863 31.242,46.863 33.782,49.403 33.782,50.673 33.782,51.308 33.782,52.578 33.782,53.213 38.227,57.658 38.862,57.658 40.132,57.658 43.307,57.658 46.164,57.658 46.482,57.658 48.387,57.658 49.022,57.658 54.102,62.738 54.102,63.373 54.102,69.723 55.372,70.993 59.182,70.993 64.262,65.913 67.437,65.913 U2.16@68.707,64.643
  B.Cu w0.368: SW1.12@17.907,35.433 SW1.11@20.447,35.433 SW1.10@22.987,35.433 SW1.9@25.527,35.433
pads on no net: P1.4 P1.9 P1.17 P1.27 P1.33 RR1.9 SW2.8 SW2.9 U1.29 U1.42 U1.43 U1.44 U1.47 U1.48 U1.63 U1.64 U1.66 U1.67 U2.1 U2.12 U2.19 U2.23 U2.26 U2.27 U2.32 U2.34 U2.35 U2.38 U4.26 U6.9 U6.10 U6.11 U6.12 U6.13 U6.14 U6.15 U7.13 U7.14 U7.15 U8.1 U8.2 U8.3 U8.4 U8.5 U8.6 U8.9 U8.10 U8.11 U8.12 U8.13

## Polygon pours and split planes (outlines as drawn)
GND on F.Cu "F.Cu-GND" (solid, remove dead copper, pour order 0): 104.267,7.493 104.267,83.693 0.127,83.693 0.127,9.08 81.407,9.08 81.407,7.493
GND on B.Cu "B.Cu-GND" (solid, remove dead copper, pour order 1): 104.267,7.493 104.267,83.693 0.127,83.693 0.127,9.08 81.407,9.08 81.407,7.493

## Keep-outs
Edge.Cuts:
  lines w0.381: 0.127,0.508 ccw(c0.762,0.508) 0.762,-0.127 ; 0.127,0.508 ccw(c0.762,0.508) 0.762,-0.127 ; 0.127,0.508 0.127,81.153 ; 0.127,0.508 0.127,81.153 ; 0.127,81.153 cw(c2.667,81.153) 2.667,83.693 ; 0.127,81.153 cw(c2.667,81.153) 2.667,83.693 ; 0.762,-0.127 80.772,-0.127 ; 0.762,-0.127 80.772,-0.127 ; 2.667,83.693 101.727,83.693 ; 2.667,83.693 101.727,83.693 ; 80.772,-0.127 ccw(c80.772,0.508) 81.407,0.508 ; 80.772,-0.127 ccw(c80.772,0.508) 81.407,0.508 ; 81.407,0.508 81.407,7.493 ; 81.407,0.508 81.407,7.493 ; 81.407,7.493 101.727,7.493 ; 81.407,7.493 101.727,7.493 ; 101.727,7.493 ccw(c101.727,10.033) 104.267,10.033 ; 101.727,7.493 ccw(c101.727,10.033) 104.267,10.033 ; 101.727,83.693 cw(c101.727,81.153) 104.267,81.153 ; 101.727,83.693 cw(c101.727,81.153) 104.267,81.153 ; 104.267,10.033 104.267,81.153 ; 104.267,10.033 104.267,81.153

## Silkscreen, mask and mechanical layers (free items; w line width, h text height)
F.SilkS:
  lines w0.254: 90.614,13.208 91.885,11.938 ; 92.519,12.573 93.789,11.303 ; 90.614,12.573 90.614,13.843 ; 90.614,12.573 91.885,11.303 ; 90.614,12.573 89.344,11.303 88.075,11.303 90.614,13.843 ; 90.614,13.843 91.885,12.573 ; 91.885,11.303 91.885,12.573 ; 91.885,11.303 92.519,11.938 ; 91.885,12.573 92.519,13.208 ; 92.519,11.938 93.154,11.303 94.424,11.303 92.519,13.208 ; 92.519,11.938 92.519,13.208
  text "ISA Floppy Disk / and Serial Controller / Version 1.0 / Copyright (C) 2012 / Sergey Kiselev" at 79.923,73.914 h1.52
  text "www.malinov.com" at 83.797,9.165 h1.27
B.SilkS:
  text "SW1.1 - SW1.4: Serial Port IRQ Selection / SW1.1: ON: IRQ3 (COM2, COM4)  SW1.3: ON: IRQ5 / SW1.2: ON: IRQ4 (COM1, COM3)  SW1.4: ON: IRQ7 / SW1.5 - SW1.8: Serial Port I/O Address Selection / SW1.5: ON: 0x2E8 (COM4)  SW1.7: ON: 0x2F8 (COM2) / SW1.6: ON: 0x3E8 (COM3)  SW1.8: ON: 0x3F8 (COM1)" at 79.502,47.637 h1.02
  text "SW2.1: ON: Enable ROM / SW2.2: ON: Enable EEPROM write" at 79.502,42.099 h1.02
  text "SW2.3 - SW2.7: ROM Address Selection / 1 = ON; 0 = OFF" at 79.502,36.923 h1.02
  text "10011 - 0xD8000 / 10010 - 0xDA000 / 10001 - 0xDC000 / 10000 - 0xDE000" at 41.402,31.075 h0.76
  text "10111 - 0xD0000 / 10110 - 0xD2000 / 10101 - 0xD4000 / 10100 - 0xD6000" at 53.467,31.075 h0.76
  text "11011 - 0xC8000 / 11010 - 0xCA000 / 11001 - 0xCC000 / 11000 - 0xCE000" at 67.437,31.075 h0.76
  text "11111 - 0xC0000 / 11110 - 0xC2000 / 11101 - 0xC4000 / 11100 - 0xC6000" at 79.502,31.075 h0.76
  text "00111 - 0xF0000 / 00110 - 0xF2000 / 00101 - 0xF4000" at 53.467,19.015 h0.76
  text "11011 - 0xE8000 / 11010 - 0xEA000 / 11001 - 0xEC000 / 11000 - 0xEE000" at 67.437,18.375 h0.76
  text "01111 - 0xE0000 / 01110 - 0xE2000 / 01101 - 0xE4000 / 01100 - 0xE6000" at 79.502,18.375 h0.76
  text "SW2.8 - NOT USED" at 79.299,12.497 h1.02

## Text inside footprints (layer, text, board x,y; h text height)
C11: F.SilkS "+" at 89.666,14.474 h1.02 r90
C12: F.SilkS "+" at 15.681,72.577 h1.02
C13: F.SilkS "+" at 89.666,22.094 h1.02 r90
C14: F.SilkS "+" at 96.016,22.094 h1.02 r90